# Altium PCB CH579M-R1.PcbDoc
Units mil, origin at the board's own origin, x right, y up, seen from the top; angles counter-clockwise.
Board outline 2218 x 2789.18 mil, 2 copper layers (Top Layer, Bottom Layer); 48 components, 67 nets, 240 pads, 289 vias.
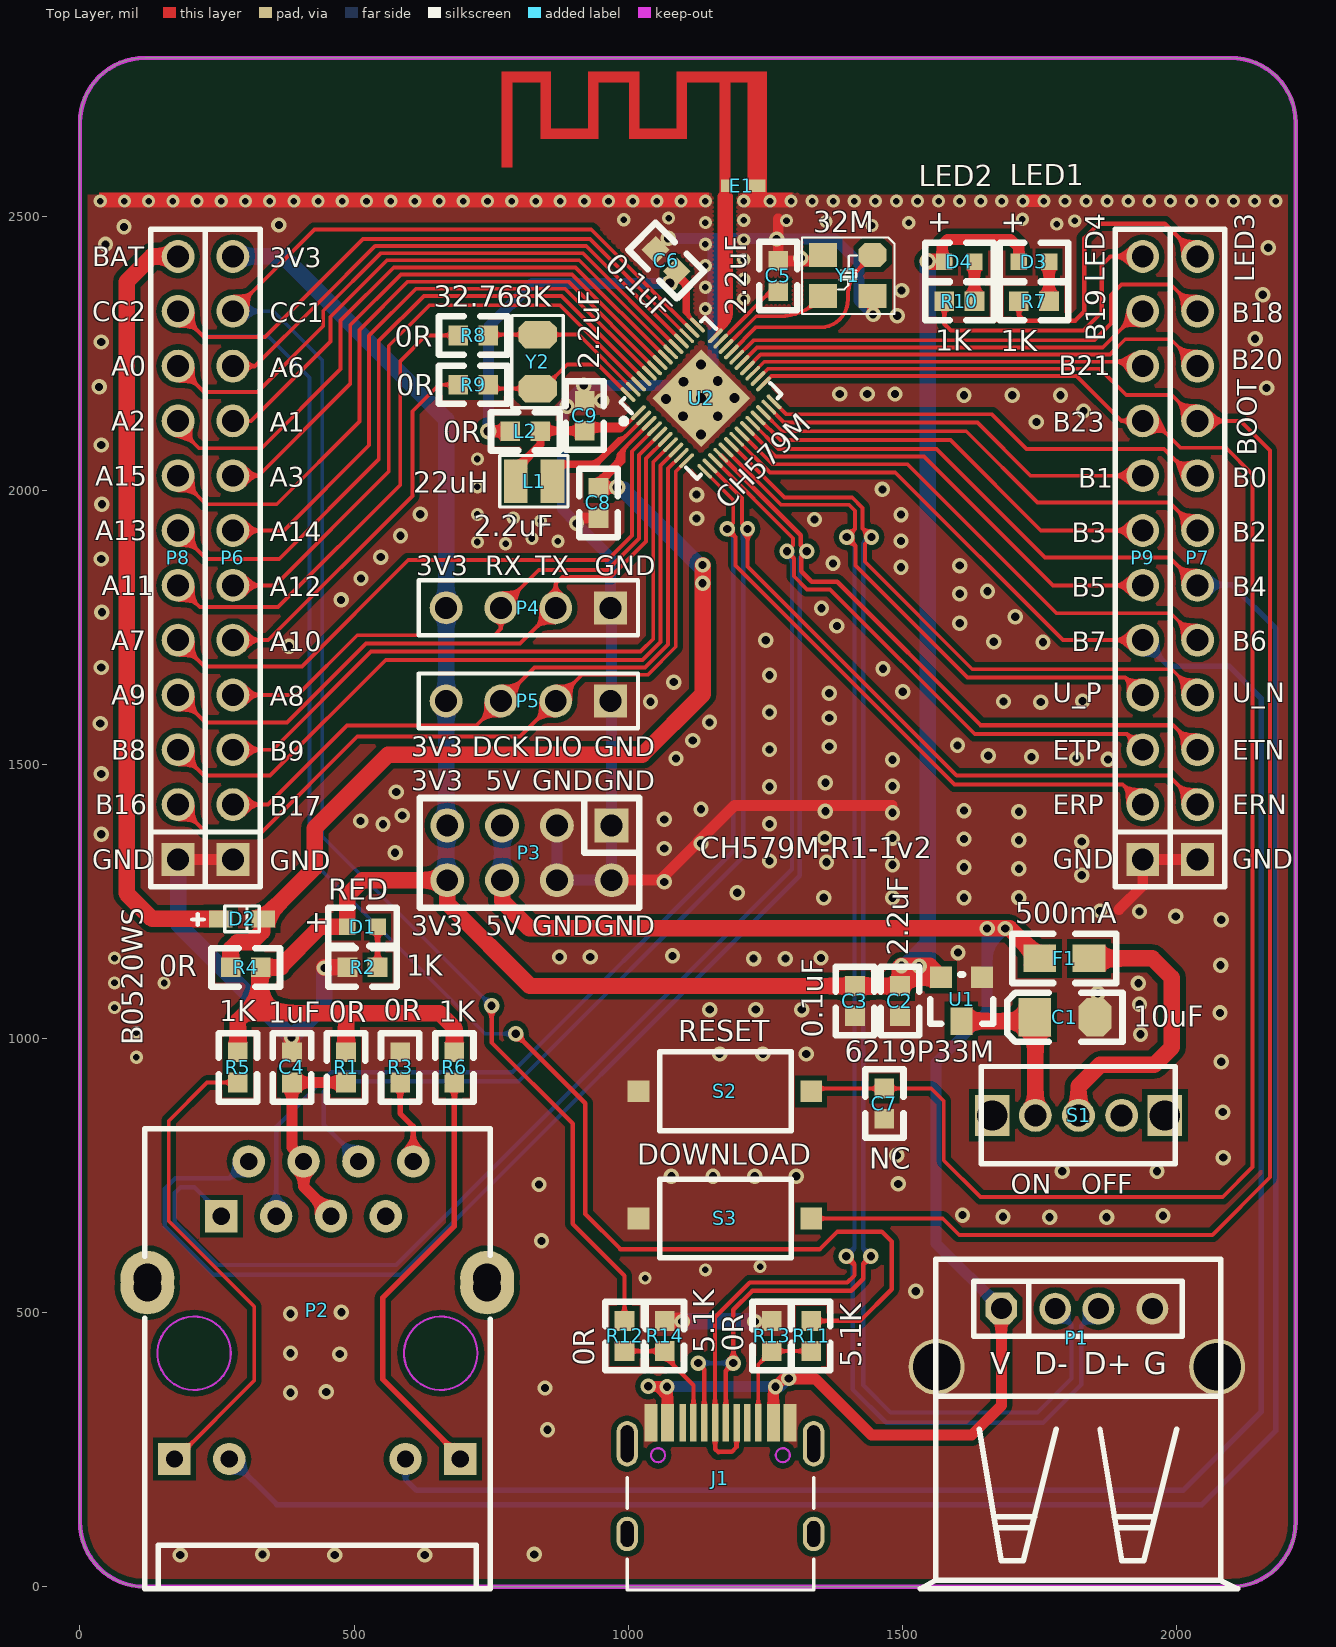
[diagram p0: Top Layer view]
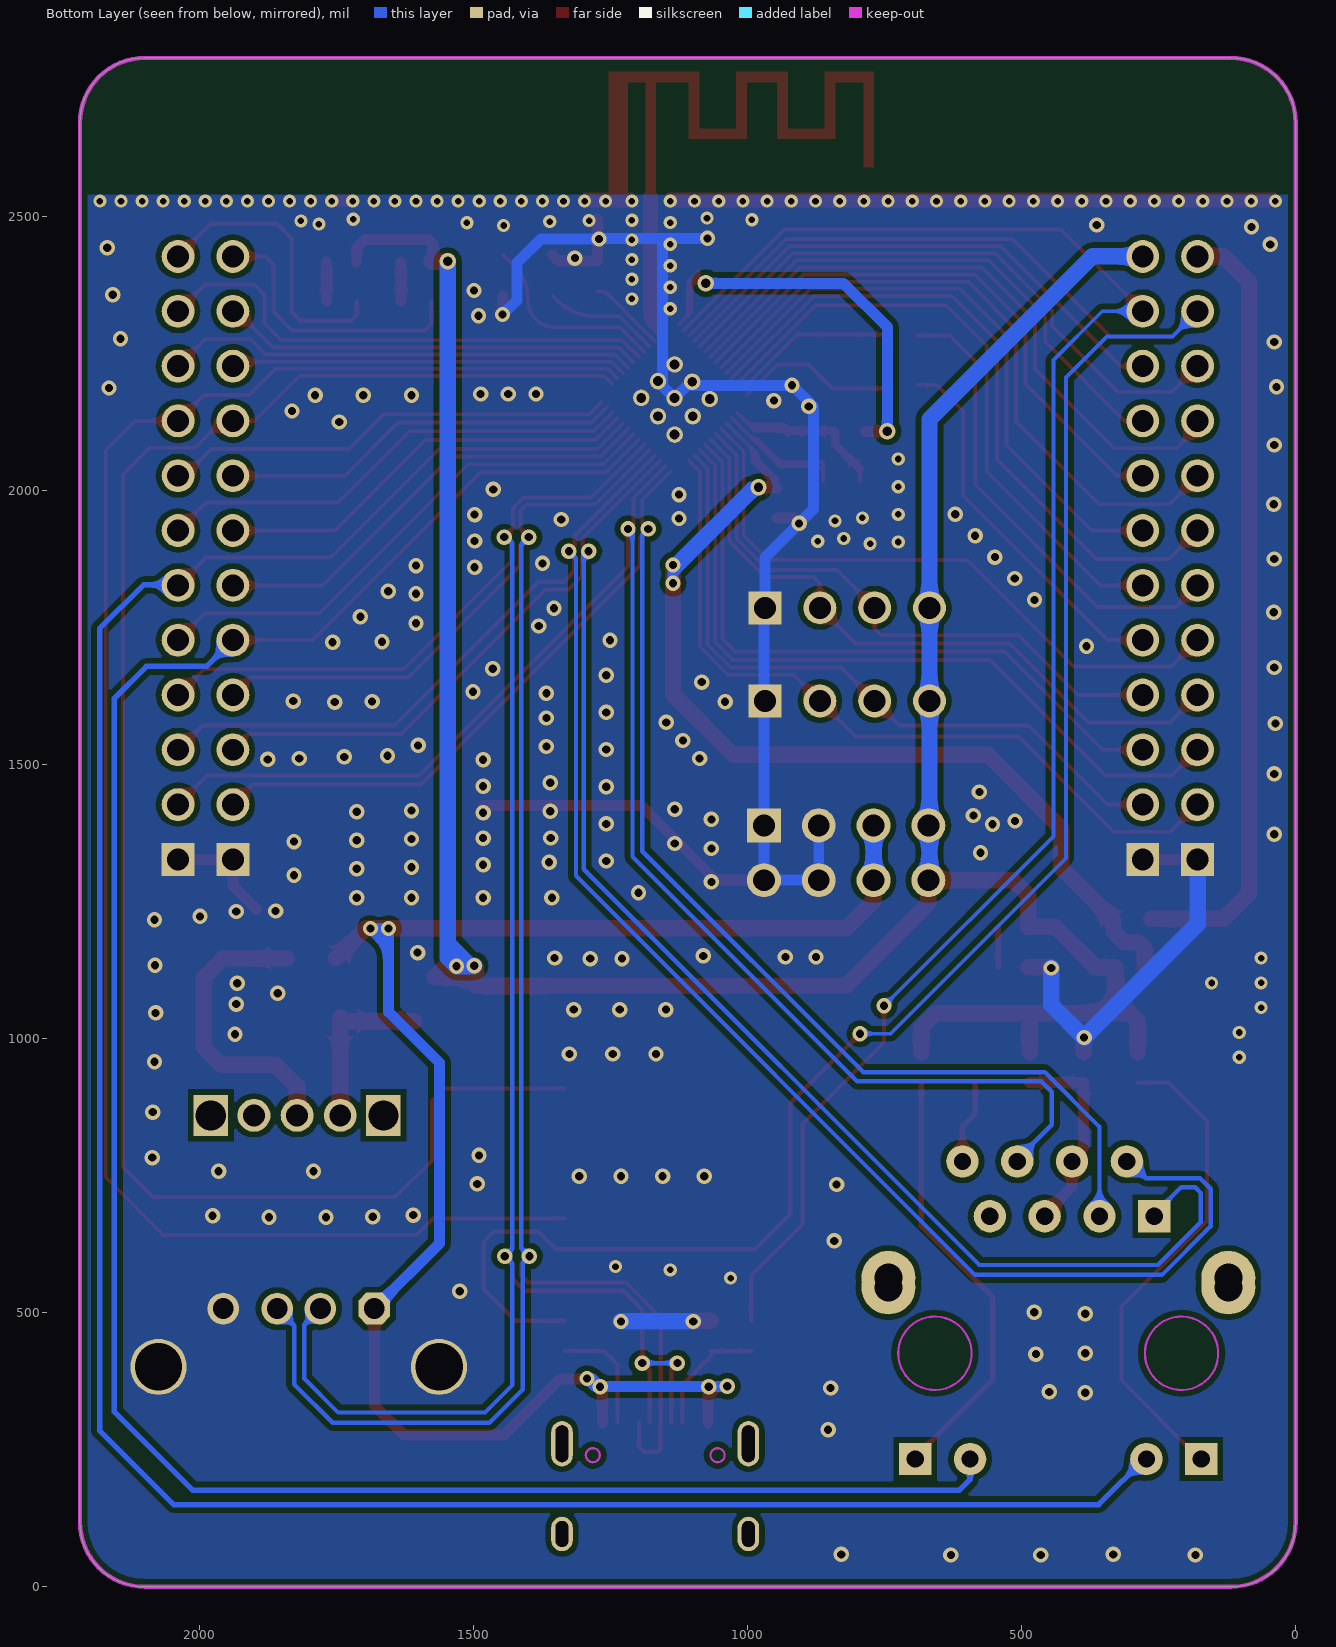
[diagram p1: Bottom Layer view, seen from below]

## Layer stack, top to bottom
Top Solder: solder mask 0.4, Solder Resist, Dk 3.5
Top Layer: signal copper 1.4
Dielectric1: dielectric 12.6, FR-4, Dk 4.8
Bottom Layer: signal copper 1.4
Bottom Solder: solder mask 0.4, Solder Resist, Dk 3.5

## Board outline
0,118.11 0,2671.07 cw(c118.11,2671.07) 118.11,2789.18 2099.89,2789.18 cw(c2099.89,2671.07) 2218,2671.07 2218,118.11 cw(c2099.89,118.11) 2099.89,0 118.11,0 cw(c118.11,118.11)

## Design rules (kind name [scope] priority, off if disabled: settings)
Clearance Clearance111 [InNamedPolygon('GNDAA')] p1: gap=6
Clearance ClearanceALL [InPolygon] p2: gap=10
Clearance [All] p3: gap=6
ComponentClearance [All] p1 off: gap=10 collisioncheckmode=3 verticalgap=10 showdistances=FALSE
DiffPairsRouting [All] p1: maxlimit=6 minlimit=6 mostfreqgap=6 toplayer_minwidth=15 toplayer_maxwidth=15 toplayer_prefwidth=15 bottomlayer_minwidth=15 bottomlayer_maxwidth=15 bottomlayer_prefwidth=15 maxuncoupledlength=500
MinimumSolderMaskSliver [All] p1 off: minsoldermaskwidth=10
PolygonConnect [All] p1: connectstyle=Direct reliefconductorwidth=10 reliefentries=4 polygonreliefangle="90 Angle" airgapwidth=10
RoomDefinition CH579M-R1 [InComponentClass('CH579M-R1')] p1: confinementstyle=ConfineIn formatcopy=TRUE lockcomponents=FALSE outline -11451,-3963 -9451,-3963 -9451,-2963 -11451,-2963
RoutingVias [All] p1: holewidth=15 width=28 viastyle="Through Hole" minholewidth=12 minwidth=24 maxholewidth=28 maxwidth=50
SilkToSilkClearance [All] p1 off: silktosilkclearance=10
SilkToSolderMaskClearance SilkscreenOverComponentPads [IsPad] p1 off: minsilkscreentomaskgap=10 clearancetoexposedcopper=TRUE
SolderMaskExpansion [All] p1: expansion=4
Width [All] p1: maxlimit=50 minlimit=6 preferedwidth=10
25 further rules are at their usual default settings.

## Classes and differential pairs
polygon class "New Class": GNDAA
polygon class "New Class 1": GNDALL
differential pair NewDifferentialPair1: +PB10 -PB11
differential pair ETH_TX: +ETH_TX_P -ETH_TX_N
differential pair ETH_RX: +ETH_RX_P -ETH_RX_N

## Components (designator, comment, footprint, x,y, rotation, side; value= is the part's Value field where it differs from the comment)
C1 "10uF" 3216 1742,1039 r180 top
C2 "2.2uF" 0603 1496,1096 r270 top
C3 "0.1uF" 0603 1414,1096 r270 top
C4 "1uF" 0603 386.75,975 r270 top
C5 "2.2uF" 0603 1274,2364 r90 top
C6 "0.1uF" 0603 1089,2400 r135 top
C7 "NC" 0603 1467.54,854 r90 top
C8 "2.2uF" 0603 946,1950 r90 top
C9 "2.2uF" 0603 921,2164 r270 top
D1 "RED" 0603+ 488,1204 r0 top
D2 "B0520WS" SOD323 257,1218.38 r270 top
D3 "LED1" 0603+ 1713,2417 r0 top
D4 "LED2" 0603+ 1577,2417 r0 top
E1 "ANTENNA" ANT-F-1-2.4G-1.6 1177,2556 r0 top
F1 "500mA" 0805 1751,1146.5 r0 top
J1 "TYPE-C-Receptacle-2.0" TYPE-C-Receptacle-2.0 1168.49,-6.01 r0 top
L1 "22uH" SMD-2.5*2*1.05 862,2017 r180 top
L2 "0R" 0603 840,2108 r180 top
P1 "USB" USBA-L 1681,507.42 r0 top
P2 "HR911105A" HR911105A 258,676 r0 top
P3 "Header 4X2A" IDC8 970.13,1389 r270 top
P4 "Header 4" HDR1X4 968.06,1786 r180 top
P5 "Header 4" HDR1X4 968.06,1616 r180 top
P6 "Header 12" "SIP12 - 40mil" 279,1327 r90 top
P7 "Header 12" "SIP12 - 40mil" 2039,1327 r90 top
P8 "Header 12" "SIP12 - 40mil" 179,1327 r90 top
P9 "Header 12" "SIP12 - 40mil" 1939,1327 r90 top
R1 "0R" 0603 485.5,920 r90 top
R2 "1K" 0603 543,1130 r180 top
R3 "0R" 0603 584.25,975 r270 top
R4 "0R" 0603 330,1130 r180 top
R5 "1K" 0603 288,975 r270 top
R6 "1K" 0603 683,975 r270 top
R7 "1K" 0603 1713,2345.33 r0 top
R8 "0R" 0603 690,2283 r0 top
R9 "0R" 0603 690,2193 r0 top
R10 "1K" 0603 1577,2345.33 r0 top
R11 "0R" 0603 1334,485 r270 top
R12 "0R" 0603 993.5,485 r270 top
R13 "5.1K" 0603 1262,430 r90 top
R14 "5.1K" 0603 1067,430 r90 top
S1 "SW SPDT" KEY_B 1664.32,860 r0 top
S2 "RST#" SMD_6.1x3.65x2.5mm-KEY 1018.99,903.91 r0 top
S3 "Download" SMD_6.1x3.65x2.5mm-KEY 1018.99,671.91 r0 top
U1 "6219P33M" SOT-23 1646,1112 r180 top
U2 "CH579M" QFN48_5X5 1019,2142 r315 top
Y1 "32M" 3225 1446,2355 r180 top
Y2 "32.768K" fc-135 835,2186 r90 top

## Footprints (in the part's own frame and the unit in brackets; to place one, negate y for a bottom-side part, rotate by r counter-clockwise, add the part's x,y. Pads: shape width x height; smd on the part's side, far side on the other; paste and mask are expansions set on the pad)
0603 [mil]
  rect 36x36 smd: 1(0,0) 2(55,0)
  silkscreen extent -35,-35 90,35
0603+ [mil]
  rect 30x30 smd: 1(0,0) 2(55,0)
  silkscreen extent -35,-35 90,35
0805 [mil]
  rect 60x50 smd: 1(0,0) 2(90,0)
  silkscreen extent -50,-45 140,45
3216 [mil]
  rect 60x70 smd: 1(0,0)
  oct 60x70 smd: 2(-110,0)
  silkscreen extent -160,-45 50,45
3225 [mm]
  oct 1.3x1.1 smd: 1(0,-1.9)
  rect 1.3x1.1 smd: 2(2.3,-1.9) 3(2.3,0) 4(0,0)
  silkscreen extent -1.02,-2.7 3.27,0.84
ANT-F-1-2.4G-1.6 [mm]
  rect 0.8x0.6 smd mask+0: 0(1.483,0)
  rect 0.4x0.6 smd mask+0: 1(0,0)
  Top Layer region: 0.24,5.027 -0.26,5.027 -0.26,-0.304 0.24,-0.304
  Top Layer region: 1.94,5.002 1.04,5.002 1.04,-0.304 1.94,-0.304
  Top Layer region: 1.94,5.296 -2.26,5.296 -2.26,4.796 1.94,4.796
  Top Layer region: -1.759,4.977 -2.259,4.977 -2.259,2.157 -1.759,2.157
  Top Layer region: -1.85,2.651 -4.39,2.651 -4.39,2.156 -1.85,2.156
  Top Layer region: -3.96,4.976 -4.46,4.976 -4.46,2.156 -3.96,2.156
  Top Layer region: -3.96,5.296 -6.36,5.296 -6.36,4.796 -3.96,4.796
  Top Layer region: -5.861,4.977 -6.361,4.977 -6.361,2.157 -5.861,2.157
  Top Layer region: -5.874,2.657 -8.364,2.657 -8.364,2.157 -5.874,2.157
  Top Layer region: -8.061,4.977 -8.561,4.977 -8.561,2.157 -8.061,2.157
  Top Layer region: -8.06,5.296 -10.36,5.296 -10.36,4.796 -8.06,4.796
  Top Layer region: -9.86,4.976 -10.36,4.976 -10.36,0.856 -9.86,0.856
fc-135 [mil]
  oct 50x70 smd: 1(0,0) 2(98.43,0)
  silkscreen extent -35,-47 133,47
HDR1X4 [mil] "Connector; Header; 4 Position"
  rect 60x60 hole 40: 1(0,0)
  round 60 hole 40: 2(100,0) 3(200,0) 4(300,0)
  silkscreen extent -50,-50 350,50
HR911105A [mm]
  rect 1.5x1.5 hole 0.8: 1(0,0) 9(-2.175,-11.252) 12(11.075,-11.252)
  round 1.5 hole 0.8: 2(1.27,2.54) 3(2.54,0) 4(3.81,2.54) 5(5.08,0) 6(6.35,2.54) 7(7.62,0) 8(8.89,2.54) 10(0.365,-11.252) 11(8.535,-11.252)
  round 2.5 hole 1.3: ""(-3.43,-2.852) ""(-3.43,-3.3) ""(12.32,-3.3) ""(12.32,-2.852)
  Keep-Out Layer circle w0.1: c-1.265,-6.352 r1.7
  Keep-Out Layer circle w0.1: c10.165,-6.352 r1.7
  silkscreen extent -3.55,-17.27 12.45,4.06
IDC8 [mil]
  rect 62x62 hole 40: 1(0,0)
  round 62 hole 40: 2(100,0) 3(0,-100) 4(100,-100) 5(0,-200) 6(100,-200) 7(0,-300) 8(100,-300)
  silkscreen extent -50,-350 150,50
KEY_B [mm]
  rect 1.6x1.9 hole 1.4: 0(0,0) 0(8,0)
  round 1.524 hole 1.016: 1(4,0) 2(2,0) 3(6,0)
  silkscreen extent -0.52,-2.24 8.48,2.26
QFN48_5X5 [mm]
  rect 3.2x3.2 smd: 0(1.575,2.525)
  oval 0.18x0.9 smd: 1(0,0) 2(0.35,0) 3(0.7,0) 4(1.05,0) 5(1.4,0) 6(1.75,0) 7(2.1,0) 8(2.45,0) 9(2.8,0) 10(3.15,0) 25(3.15,5.037) 26(2.8,5.037) 27(2.45,5.037) 28(2.1,5.037) 29(1.75,5.037) 30(1.4,5.037) 31(1.05,5.037) 32(0.7,5.037) 33(0.35,5.037) 34(0,5.037)
  oval 0.9x0.18 smd: 11(4.089,0.25) 12(4.089,0.6) 13(4.089,0.95) 14(4.089,1.3) 15(4.089,1.65) 16(4.089,2) 17(4.089,2.35) 18(4.089,2.7) 19(4.089,3.05) 20(4.089,3.4) 21(4.089,3.75) 22(4.089,4.1) 23(4.089,4.45) 24(4.089,4.8) 35(-0.939,4.8) 36(-0.939,4.45) 37(-0.939,4.1) 38(-0.939,3.75) 39(-0.939,3.4) 40(-0.939,3.05) 41(-0.939,2.7) 42(-0.939,2.35) 43(-0.939,2) 44(-0.939,1.65) 45(-0.939,1.3) 46(-0.939,0.95) 47(-0.939,0.6) 48(-0.939,0.25)
  silkscreen extent -0.93,-0.89 4.08,5.29
"SIP12 - 40mil" [mil]
  rect 60x60 hole 40: 1(0,0)
  round 60 hole 40: 2(100,0) 3(200,0) 4(300,0) 5(400,0) 6(500,0) 7(600,0) 8(700,0) 9(800,0) 10(900,0) 11(1000,0) 12(1100,0)
  silkscreen extent -50,-50 1150,50
SMD-2.5*2*1.05 [mm]
  rect 1.1x2 smd: 1(0,0) 2(1.7,0)
  silkscreen extent -0.72,-1.19 2.44,1.2
SMD_6.1x3.65x2.5mm-KEY [mm]
  rect 1x1 smd: 1(0,0) 2(8,0)
  silkscreen extent 0.98,-1.83 7.08,1.83
SOD323 [mm]
  rect 0.8x1.1 smd: 1(0,0) 2(0,1.972)
  silkscreen extent -0.6,-1.32 0.6,1.79
SOT-23 [mil]
  rect 40x40 smd: 1(0,0) 2(75,0)
  rect 40x50 smd: 3(38,80)
  silkscreen extent -20,-5 95,85
TYPE-C-Receptacle-2.0 [mm]
  oval 1x1.6 hole 0.6 slot 1.2 at 90 deg: 0(-4.32,2.6) 0(4.32,2.6)
  oval 1x2.1 hole 0.6 slot 1.7 at 90 deg: 0(-4.32,6.78) 0(4.32,6.78)
  rect 0.6x1.75 smd: A1(-3.225,7.75) A4(-2.45,7.75) B1(3.225,7.75) B4(2.45,7.75)
  rect 0.3x1.75 smd: A5(-1.25,7.75) A6(-0.25,7.75) A7(0.25,7.75) A8(1.25,7.75) B5(1.75,7.75) B6(0.75,7.75) B7(-0.75,7.75) B8(-1.75,7.75)
  Keep-Out Layer circle w0.1: c2.89,6.25 r0.325
  Keep-Out Layer circle w0.1: c-2.89,6.25 r0.325
  silkscreen extent -4.32,0 4.32,5.2
USBA-L [mm]
  oct 1.473x1.473 hole 0.965: 1(0,0)
  round 1.473 hole 0.965: 2(2.5,0) 3(4.5,0) 4(7,0)
  round 2.6 hole 2.2: 5(-3,-2.7) 6(10,-2.7)
  silkscreen extent -3.75,-12.99 10.95,2.29

## Part data
C1 C2 C3 C4 C5 C6 C7 C8 C9: library part CAP, "Capacitor"
D1: library part LED0, "Typical INFRARED GaAs LED"
D2: library part DIODE, "Diode"
D3 D4: library part LED
E1: "Generic Antenna"
F1: library part FUSE1, "Fuse"
J1: "Type-C USB2.0 母座"
L1 L2: library part INDUCTOR
P1: "USB Port"
P3: "Header, 4-Pin, Dual row"
P4 P5: "Header, 4-Pin"
P6 P7 P8 P9: "Header, 12-Pin"
R1 R2 R3 R4 R5 R6 R7 R8 R9 R10 R11 R12 R13 R14: library part RES
S2 S3: library part KEY1
U2: "ARM M0 MCU with BLE+Zigbee+Ethernet+USB"
Y1 Y2: library part XTAL, "Crystal Oscillator"

## Free pads (board coordinates)
  round 30 hole 18: 0(1133,2230) 1(1163.5,2199.5) 2(1194,2169) 3(1163.5,2135.5) 4(1133,2102) 5(1100,2135.5) 6(1069,2167) 7(1101,2198.5) 9(1133.14,2168.45)

## Via types
v1: diameter 28, hole 15, Top Layer to Bottom Layer, tented both sides, 196 vias
v2: diameter 24, hole 12, Top Layer to Bottom Layer, tented both sides, 89 vias
v3: diameter 30, hole 17, Top Layer to Bottom Layer, tented both sides, 4 vias

## Nets (pads, with @x,y where several pads share a name; then routed paths per layer and width w, separated by ;. In a path a pad name is that pad's centre, name@x,y a point inside that pad or via, vN(x,y) a via of type N, cw(c..) or ccw(c..) an arc to the next point about the centre after c; other vN are vias at no path point)
3V3: C2.1 C3.1 D1.1 D3.1 D4.1 P3.7 P3.8 P4.4 P5.4 P6.12 R1.2 R4.1 R5.1 R6.1 U1.2 | length 5300.1
  Top Layer w20: D4.1 1573,2421 1573,2448 1583,2458 1698,2458 1713,2443 D3.1
  Top Layer w30: R5.1 288,1032.5 302,1046.5 ; 367,1130 364.5,1130 ; R1.2 485.5,1041 491,1046.5 ; R6.1 683,1020 656.5,1046.5 491,1046.5 ; v3(1547,2418) 1548,2417 D4.1 ; 302,1046.5 328,1072.5 ; 302,1046.5 324,1046.5 ; 324,1046.5 328,1050.5 328,1072.5 ; 324,1046.5 354,1046.5 ; 328,1072.5 328,1130 R4.1 364.5,1130 ; 328,1072.5 354,1046.5 ; 354,1046.5 491,1046.5 ; 364.5,1130 438.5,1204 D1.1 488,1261.5 515.5,1289 P3.8 670.13,1246.87 821,1096 C3.1 C2.1 ; C2.1 1496,1130.25 v1(1498.75,1133) 1550,1133 U1.2 1512,1112 C2.1
  Bottom Layer w30: P6.12 371,2427 668.06,2129.94 P4.4 P5.4 668.06,1291.06 P3.8 ; v1(1498.75,1133) 1499.75,1132 v1@1505,1132 ; v3(1547,2418) 1547,1174 ; v1@1505,1132 1547,1174 ; v1@1505,1132 v1(1531,1132) 1547,1148 1547,1174
+5V: F1.1 J1.A4 J1.B4 P1.1 P3.5 P3.6 | length 3168
  Top Layer w20: v1(1037,366) 1038,365 1054.5,365 ; J1.A4 1072.04,347.46 ; J1.B4 1264.95,360.95 v1(1269,365) 1283,379 1342,379 1444,277 1627,277 1681,331 P1.1 ; 1054.5,365 1072.04,347.46 ; 1054.5,365 v1(1071,365) 1072.04,363.96 1072.04,347.46
  Top Layer w30: P3.6 770.13,1250.87 820,1201 v1(1655,1201) v1(1688,1201) 1696.5,1201 F1.1
  Bottom Layer w20: v1(1037,366) 1038,365 v1(1071,365) v1(1269,365) ; P1.1 1562,626.42 1562,956 1655,1049 1655,1168 ; v1(1269,365) 1278.06,365 v1(1293,379.94) 1283.94,379.94 v1(1269,365) ; 1655,1168 v1(1688,1201) v1(1655,1201) 1655,1168
  Bottom Layer w30: P3.6 P3.5
+BAT: D2.1 P8.12 | length 1427.4
  Top Layer w30: P8.12 131,2427 85,2381 85,1265 131.62,1218.38 D2.1 D2.1@264,1218.38
ANT: E1.1 U2.34 | length 418
  Top Layer w7: 1166.49,2330.16 1166.49,2299.75 cw(c1141.72,2299.75) U2.34 ; 1168.97,2327.01 1168.97,2305.73 cw(c1135.74,2305.73) U2.34 ; 1174.22,2297.22 U2.34@1160.74,2283.74 ; 1177,2323 cw(c1121.47,2323) U2.34@1160.74,2283.74 ; 1180.22,2311.71 cw(c1159.73,2311.71) 1174.23,2297.23 1178.44,2301.44 ccw(c1157.04,2322.85) 1187.31,2322.85 ; U2.34 U2.34@1160.74,2283.74
  Top Layer w28.1: 1177,2323 1177,2523 ; 1177,2525.41 1177,2535.5
BOOT: P7.9 S3.2 U2.26 | length 3221.9
  Top Layer w7: U2.26 1254.9,2222 1861,2222 1909,2174 1992,2174 P7.9 2117,2127 2171,2073 2171,747 2065.91,641.91 1604.09,641.91 1574.09,671.91 S3.2
CC1: J1.A5 R12.2 R14.1 | length 226
  Top Layer w7: R14.1@1067,420 R14.1
  Top Layer w8: R12.2 R14.1 ; R14.1@1067,420 1119.28,367.72 J1.A5
CC2: J1.B5 R11.2 R13.1 | length 213.1
  Top Layer w7: J1.B5 1237.39,405.39 R13.1 R11.2
ETH_RX_N: P2.6 P7.2 U2.12 | length 2905.8
  Top Layer w7: U2.12 1208,1986.41 1208,1940 v1(1218,1930) 1218,1861.5 1599.5,1480 1986,1480 P7.2
  Bottom Layer w8: P2.6@508,780 445,843 445,903 464,922 800,922 1210,1332 1210,1922 v1(1218,1930)
ETH_RX_P: P2.3 P9.2 U2.11 | length 2922
  Top Layer w7: U2.11 1192,1982.92 1192,1941 v1(1181,1930) 1196,1915 1196,1863 1595.5,1463.5 1902.5,1463.5 P9.2
  Bottom Layer w8: P2.3@358,680 358,839 458,939 789,939 1192,1342 1192,1919 v1(1181,1930)
ETH_TX_N: P2.2 P7.3 U2.14 | length 3476
  Top Layer w8: U2.14 1315,1918.38 1315,1900 v1(1326,1889) 1316,1879 1316,1852.5 1335,1833.5 1381.5,1833.5 1643,1572 1994,1572 P7.3
  Bottom Layer w8: P2.2@308,780 273,745 174,745 155,726 155,658 244,569 585,569 1313,1297 1313,1876 v1(1326,1889)
ETH_TX_P: P2.1 P9.3 U2.13 | length 3251.2
  Top Layer w7: U2.13 1301,1912.89 1301,1900 v1(1290,1889) 1302.5,1876.5 1302.5,1843.5 1326.5,1819.5 1368.5,1819.5 1632.5,1555.5 1910.5,1555.5 P9.3
  Bottom Layer w8: P2.1@258,680 209,729 183.46,729 173,718.54 173,665.46 251.46,587 577,587 1299,1309 1299,1880 v1(1290,1889)
GND: C1.2 C2.2 C3.2 C4.1 C5.2 C6.2 C7.1 C8.1 C9.1 J1.A1 J1.B1 P1.4 P1.5 P1.6 P3.1 P3.2 P3.3 P3.4 P4.1 P5.1 P6.1 P7.1 P8.1 P9.1 pad.0 pad.1 pad.2 pad.3 pad.4 pad.5 pad.6 pad.7 pad.9 R2.2 R3.1 R13.2 R14.2 S2.1 S3.1 U1.1 U2.0 | length 4102.1
  Top Layer w20: P8.1 P6.1 ; v1(906,1940) 916,1950 C8.1 ; P3.2 1058,1289 1194,1425 v1@1482,1425 ; 1235.38,2533.62 1235.38,2556 ; v1(1271,2459) cw(c1263.76,2451.76) v1@1274,2451.76 ; 1274,2495 1274,2492.5 v1@1274,2451.76 ; 1355.45,2429.8 1344.65,2419 C5.2 v1@1274,2451.76 ; 1446,2355 1446,2323.41 ccw(c1449.41,2323.41) v1(1447,2321) ; 1896,1236 1939,1279 P9.1 P7.1
  Top Layer w30: v1(386,1002) 386.75,1001.25 C4.1 ; v1(446,1129) 447,1130 R2.2 ; R14.2 1098,485 v1(1099,484)
  Bottom Layer w20: P3.3 P3.4 P3.2 P3.1 970.13,1783.94 P4.1 968.06,1877.94 v1(906,1940) 880,1966 880,2153 v1(919,2192) 1109.59,2192 pad.9 1155,2190.31 1155,2447 v2@1142,2460 ; v1(1073,2460) v2@1142,2460 ; v1(1447,2321) 1421,2347 1421,2415 1377,2459 v1(1271,2459) ccw(c1268.59,2456.59) 1268.59,2460 v2@1142,2460
  Bottom Layer w30: P8.1 179,1209 v1(386,1002) 446,1062 v1(446,1129) ; v1(1099,484) v1(1231,484)
  other v1: 183,58 465,58 629,58 333,59 829,59 853,286.5 384,354 449.5,355.5 848.5,362.5 474,424.5 384,426 384,498 477,501 1525,539 842,631 1769,674 1873,674 1684,675 1976,677 1610,678 837.5,734 1493,735 1079,749 1155,749 1231,749 1307,749 1792,758 1965,758 2086,783 1490,787 2085,866 2082,958 1167,972 1246,972 1325,972 1935,1008 2080,1047 1149,1053 1233,1053 1317,1053 1933,1063 1857,1083 1931,1101 2081,1134 1229,1146 1287,1146 1352,1147 875,1149 931,1149 1081,1151 1602,1157 2082,1217 1999,1223 1933,1232 1861,1233 1357,1257 1482.5,1257 1613,1257 1713,1257 1199,1266 1066,1286 1827.5,1298 1713,1310 1613,1312.67 1482.5,1317.4 1362,1322 1258,1324 575,1339 1066,1347 1133,1356 1827.5,1359.5 1713,1362 1613,1364.33 1359,1366 1482.5,1365.8 39,1373 553,1391 1258,1391.8 512,1397 1066,1400 588,1407 1482.5,1412.2 1713,1414 1360,1415 1613,1416 1133,1418.5 577,1450 1258,1459.6 1482.5,1460.6 1360,1467 39,1483 1482.5,1509 1875.5,1509.5 1087.5,1511 1818,1511 1736,1514 1657,1516 1258,1527.4 1367,1533 1601,1535 1118,1544 37,1575 1148.5,1577 1367,1585 1258,1595.2 1753,1614 1041,1614.5 1685,1615 1829,1615.75 1367,1630 1501,1632.75 1083.5,1650.5 1258,1663 1465,1675 39,1677 381.5,1716 1757,1723 1667,1724 1251,1727 1381,1752.75 1605,1758 1706.33,1769.67 40,1778 1353,1785 476.5,1800.5 1605,1811.5 1655.67,1816.33 512.62,1839.5 1498,1860 1605,1863 1374,1867 39,1875 548.75,1878.5 1498,1908 584.88,1917.5 1340,1947 1125,1949 1498,1956 621,1956.5 40,1975 1125,1992.5 1464,2002 39,2083 1745,2125 1831,2145 888.5,2153.5 952,2164 1613,2174 1701,2174 1789,2174 1386,2176 1436.5,2176 1487,2176 2165,2187 35,2189 39,2271 2144,2277 1491,2319 2158,2357 1499,2365 1315,2424 2168,2443 46.5,2449 80.5,2481 363,2484.5
  other v2: 1031,563 1141,578 1241,584 103,966 103,1011.25 63,1056.5 153.5,1101.5 63,1101.75 63,1147 776.5,1903 725,1906 872,1907.5 824.5,1912.5 840.5,1944.5 790.5,1950 725,1956.5 725,2007 725,2057.5 1141,2331.5 1211.05,2349.5 1141,2370.8 1211.05,2385.38 1141,2410.1 1211.05,2421.25 1141,2449.4 1211.05,2457.12 1445,2483.5 1782,2486 1141,2488.7 1512,2488.5 1361,2490.5 1815,2492 1211.05,2493 1289,2492.5 992,2494 1719.5,2495 1074,2497 37,2528 81.16,2528 125.32,2528 169.48,2528 213.64,2528 257.8,2528 301.96,2528 346.12,2528 390.28,2528 434.44,2528 478.6,2528 522.76,2528 566.92,2528 611.08,2528 655.24,2528 699.4,2528 743.56,2528 787.72,2528 831.88,2528 876.04,2528 920.2,2528 964.36,2528 1008.52,2528 1052.68,2528 1096.84,2528 1141,2528 1211.05,2528 1258.94,2528 1297.38,2528 1335.82,2528 1374.26,2528 1412.7,2528 1451.14,2528 1489.58,2528 1528.02,2528 1566.46,2528 1604.9,2528 1643.34,2528 1681.78,2528 1720.22,2528 1758.66,2528 1797.1,2528 1835.54,2528 1873.98,2528 1912.42,2528 1950.86,2528 1989.3,2528 2027.74,2528 2066.18,2528 2104.62,2528 2143.06,2528 2181.5,2528
NetC4_2: C4.2 P2.4 P2.5 R1.1 | length 368.3
  Top Layer w20: P2.5@458,680 408,730 P2.4 408,780 386.75,801.25 C4.2 R1.1
NetD1_2: D1.2 R2.1 | length 74
  Top Layer w10: R2.1 D1.2
NetD3_2: D3.2 R7.2 | length 71.7
  Top Layer w20: R7.2 D3.2
NetD4_2: D4.2 R10.2 | length 71.7
  Top Layer w20: R10.2 D4.2
NetF1_2: F1.2 S1.1 | length 545.2
  Top Layer w30: S1.1 1821.8,912.8 1861,952 1960,952 1992,984 1992,1111 1956.5,1146.5 F1.2
NetP2_8: P2.8 R3.2 | length 149.8
  Top Layer w10: R3.2 584.25,863.75 608,840 P2.8@608,780
NetP2_9: P2.9 R5.2 | length 896.8
  Top Layer w7: P2.9@172.37,237.01 179.01,237.01 318,376 318,511 162,667 162,850 232,920 R5.2
NetP2_12: P2.12 R6.2 | length 795.7
  Top Layer w10: R6.2 683,658 552.5,527.5 552.5,378.53 P2.12@694.02,237.01
NetP7_12: P7.12 R7.1 | length 532.1
  Top Layer w8: R7.1 1713,2320 1723,2310 1816,2310 1832,2326 1832,2460 1859,2487 1979,2487 P7.12
NetP9_12: P9.12 R10.1 | length 514.6
  Top Layer w8: R10.1 1577,2304 1589,2292 1831,2292 1864.5,2325.5 1864.5,2411.5 1880,2427 P9.12
PA0: P8.10 U2.39 | length 1119.7
  Top Layer w7: P8.10 226,2180 324,2180 444,2300 444,2328 549,2433 917.3,2433 U2.39
PA1: P6.9 U2.40 | length 1015.6
  Top Layer w7: P6.9 312,2127 457,2272 457,2317 560,2420 910.82,2420 U2.40
PA2: P8.9 U2.41 | length 1173.1
  Top Layer w7: P8.9 179,2115 217,2077 331,2077 475.5,2221.5 475.5,2310 572.5,2407 904.33,2407 U2.41
PA3: P6.8 U2.42 | length 1060.7
  Top Layer w7: P6.8 326,2027 493,2194 493,2301.5 585.5,2394 897.84,2394 U2.42
PA4: P6.11 R12.1 U2.36 | length 3157
  Top Layer w7: P6.11 428,2476 932.77,2476 U2.36
  Top Layer w8: v1(751,1060) 751,993 899,845 899,662 993.5,567.5 R12.1
  Bottom Layer w7: P6.11 353,2327 442,2238 442,1369 v1(751,1060)
PA5: P8.11 R11.1 U2.37 | length 4016.3
  Top Layer w7: P8.11 226,2280 337.5,2280 516.5,2459 930.28,2459 U2.37
  Top Layer w8: v1(795,1009) 922,882 922,680 986,616 1350,616 1382,648 1463,648 1481,630 1481,543 1423,485 R11.1
  Bottom Layer w7: P8.11 225,2281 344,2281 419,2206 419,1329 739,1009 v1(795,1009)
PA6: P6.10 U2.38 | length 980.8
  Top Layer w7: P6.10 319.69,2227 431,2338.31 431,2338.38 538.62,2446 923.79,2446 U2.38
PA7: P8.5 U2.4 | length 1158.9
  Top Layer w7: P8.5 227,1679 405,1679 599,1873 962.23,1873 1007,1917.77 1007,2071.54 U2.4
PA8: P4.3 P6.4 U2.5 | length 1087.8
  Top Layer w7: P6.4 397,1627 506,1736 756,1736 768.06,1748.06 P4.3 837.06,1855 962.62,1855 1020,1912.38 1020,2064.99 U2.5 U2.5
PA9: P4.2 P8.4 U2.6 | length 1237.9
  Top Layer w7: P8.4 229,1577 378,1577 522,1721 803.06,1721 P4.2 868.06,1830.06 880,1842 968,1842 1033,1907 1033,2058.56 U2.6
PA10: P6.5 R9.1 | length 694.5
  Top Layer w7: P6.5 343.5,1727 606.5,1990 606.5,2144.5 655,2193 R9.1
PA11: P8.6 R8.1 | length 865
  Top Layer w7: P8.6 218.5,1787.5 361.5,1787.5 584.5,2010.5 584.5,2236.5 631,2283 R8.1
PA12: P6.6 U2.46 | length 1145.8
  Top Layer w7: P6.6 356,1827 563.5,2034.5 563.5,2264 637.5,2338 875.89,2338 U2.46
PA13: P8.7 U2.45 | length 1259.3
  Top Layer w7: P8.7 231,1875 363.5,1875 545,2056.5 545,2272.5 627.5,2355 878.38,2355 U2.45
PA14: P6.7 U2.44 | length 1123.4
  Top Layer w7: P6.7 372,1927 527.5,2082.5 527.5,2282.5 613,2368 884.87,2368 U2.44
PA15: P8.8 U2.43 | length 1222.7
  Top Layer w7: P8.8 179,2026 230,1975 359,1975 510,2126 510,2293 598,2381 891.36,2381 U2.43
PB0: P7.8 U2.24 | length 828.4
  Top Layer w7: U2.24 1289.25,2139 1664,2139 1727,2076 1978,2076 2027,2027 P7.8
PB1: P9.8 U2.23 | length 734.1
  Top Layer w7: U2.23 1284.77,2124 1637.5,2124 1734.5,2027 P9.8
PB2: P7.7 U2.22 | length 881.2
  Top Layer w7: U2.22 1281.28,2108 1617,2108 1747,1978 1988,1978 P7.7
PB3: P9.7 U2.21 | length 786.9
  Top Layer w7: U2.21 1277.79,2092 1588,2092 1753,1927 P9.7
PB4: P2.10 P7.6 U2.20 | length 4575.2
  Top Layer w7: U2.20 1274.3,2076 1562.5,2076 1760.5,1878 1988,1878 P7.6
  Bottom Layer w10: P2.10@272.37,237.01 359.38,150 2047,150 2182,285 2182,1748 2102,1828 2040,1828 P7.6
PB5: P9.6 U2.19 | length 839.8
  Top Layer w7: U2.19 1268.82,2062 1540,2062 1775,1827 P9.6
PB6: P7.5 U2.18 | length 986.9
  Top Layer w7: U2.18 1263.33,2048 1509.5,2048 1781.5,1776 1990,1776 P7.5
PB7: P2.11 P9.5 U2.17 | length 4124
  Top Layer w7: U2.17 1258.84,2033 1487.5,2033 1793.5,1727 P9.5
  Bottom Layer w10: P2.11@594.02,237.01 P2.11 594.02,195.98 614,176 2012,176 2155,319 2155,1621 2097,1679 1987,1679 P9.5
PB8: P8.3 U2.8 | length 1362.2
  Top Layer w7: P8.3 226,1480 347,1480 558,1691 1026.38,1691 1059,1723.62 1059,2045.59 U2.8
PB9: P6.3 U2.7 | length 1218.2
  Top Layer w7: P6.3 352,1527 531,1706 1023,1706 1046,1729 1046,2052.08 U2.7
PB10: J1.A7 J1.B7 P1.2 P7.4 U2.16 | length 3931.9
  Top Layer w7: U2.16 1285.36,1987 1409,1987 1428,1968 1428,1931 v1(1444,1915) 1432,1903 1432,1870 1628,1674 1992,1674 P7.4
  Top Layer w8: v1(1128,408) 1138.96,397.04 J1.B7 ; J1.A7 1178.33,394.33 v1(1192,408) 1192,505.2 1226.8,540 1407,540 1429,562 1429,589 v1(1443,603)
  Bottom Layer w8: v1(1128,408) v1(1192,408) ; v1@1441,1916 1429,1904 1429,617 v1(1443,603) 1429,589 1429,368 1479,318 1747,318 1809,380 1809,477.84 P1.2
PB11: J1.A6 J1.B6 P1.3 P9.4 U2.15 | length 3868.2
  Top Layer w7: U2.15 1278.87,1974 1403,1974 1414,1963 1414,1930 v1(1399,1915) 1415,1899 1415,1863 1619,1659 1907,1659 P9.4
  Top Layer w8: J1.B6 1198.02,255.02 1189,246 1166,246 1165,245 1159,251 1159,298.76 J1.A6 1158.65,491.65 1222,555 1400,555 1413,568 1413,588 v1(1398,603)
  Bottom Layer w8: v1(1399,1915) 1413,1901 1413,618 v1(1398,603) 1410,591 1410,360 1471,299 1757,299 1827,369 1827,476.25 P1.3
PB16: P5.2 P8.2 U2.10 | length 1416.3
  Top Layer w7: P8.2 229,1377 332,1377 506,1551 803.06,1551 P5.2 916.06,1664 1036.15,1664 1087,1714.85 1087,2034.62 U2.10
PB17: P5.3 P6.2 U2.9 | length 1269.8
  Top Layer w7: P6.2 343,1427 487,1571 723.06,1571 P5.3 829.06,1677 1030.77,1677 1073,1719.23 1073,2040.1 U2.9
PB18: P7.11 U2.30 | length 946.5
  Top Layer w7: U2.30 1228.95,2274 1850,2274 1881,2305 1881,2357 1900,2376 1990,2376 P7.11
PB19: P9.11 U2.29 | length 769.8
  Top Layer w7: U2.29 1235.44,2261 1866,2261 1932,2327 P9.11
PB20: P7.10 U2.28 | length 863.2
  Top Layer w7: U2.28 1241.92,2248 1879,2248 1907,2276 1990,2276 P7.10
PB21: P9.10 U2.27 | length 723.6
  Top Layer w7: U2.27 1248.41,2235 1931,2235 P9.10
PB23: C7.2 P9.9 S2.2 U2.25 | length 3210.3
  Top Layer w7: U2.25 1261.38,2209 1818,2209 1900,2127 P9.9 1959,2127 2008,2078 2091,2078 2139.5,2029.5 2139.5,765.5 2085,711 1643,711 1576,778 1576,886 1553,909 C7.2 S2.2@1333.95,909
V5V: C1.1 S1.2 U1.3 | length 316.3
  Top Layer w30: U1.3 1735,1032 C1.1 1743.06,1037.94 S1.2
VCC: C8.2 D2.2 R4.2 U2.3 | length 2235
  Top Layer w7: C8.2@951.99,2010.99 C8.2 C8.2@946,2015 ; v3@979,2005 v3(980,2006) ; U2.3 991.49,2075.51 ; C8.2@946,2015 C8.2@951.99,2020.99 ; C8.2@946,2015 946,2021.01 951.99,2027 ; C8.2@951.99,2020.99 991.49,2060.49 ; C8.2@951.99,2020.99 951.99,2027 ; C8.2@951.99,2020.99 951.99,2012.99 991.49,2052.49 991.49,2060.49 ; 951.99,2027 983,2058.01 ; 983,2058.01 983,2067.03 991.49,2075.51 ; 983,2058.01 991.49,2066.5 ; 991.49,2060.49 991.49,2066.5 ; 991.49,2066.5 991.49,2075.51
  Top Layer w20: C8.2 v3@979,2005
  Top Layer w30: R4.2 275,1164 287,1176 313,1176 332.38,1195.38 332.38,1216.13 D2.2 ; D2.2@341.62,1218.38 D2.2 ; v1(1136,1864) v1(1136,1831) 1136,1628 1026,1518 562,1518 428,1384 428,1311.76 D2.2
  Bottom Layer w20: v1(1136,1831) 1136,1850 ; v1@1122,1864 1136,1850 ; v1@1122,1864 v1(1136,1864) ; v1@1122,1864 v3(980,2006) 994,2006 v1(1136,1864) ; 1136,1850 v1(1136,1864)
VDCIA: C6.1 L2.2 U2.35 | length 845.1
  Top Layer w7: C6.1@1090,2395 1103,2382 ; U2.35 1109.25,2319 ; 1103,2374.25 1103,2325.25 1109.25,2319 ; 1103,2374.25 1103,2382 ; 1103,2374.25 1089,2388.25 C6.1 1103,2386 ; 1103,2374.25 1109.25,2368 ; 1103,2382 1103,2386 ; 1103,2382 1109.25,2375.75 ; 1103,2386 1109.25,2379.75 1109.25,2375.75 ; 1109.25,2319 1109.25,2368 ; 1109.25,2368 1109.25,2375.75
  Top Layer w20: v3(745,2108) L2.2
  Bottom Layer w20: v3(745,2108) 745,2298 825,2378 v3(1076,2378)
VDCID: C9.2 L1.2 L2.1 U2.1 | length 455.1
  Top Layer w7: L1.2 L1.2@795.07,2039.07 ; C9.2@928,2102 C9.2 ; U2.1 998,2121 ; C9.2 C9.2@927,2115 ; C9.2 986,2109 992,2115 ; C9.2@927,2115 992,2115 ; C9.2@927,2115 933,2121 998,2121 ; 992,2115 998,2121
  Top Layer w15: L1.2@795.07,2039.07 840,2084 L2.1 ; L2.1@844,2109 C9.2
VINTA: C5.1 U2.33 | length 141.7
  Top Layer w7: U2.33 1169.07,2272.4 1197.8,2301.13 1197.8,2301.31 1250.93,2354.44 cw(c1274,2331.38) C5.1
VSW: L1.1 U2.2 | length 394.4
  Top Layer w7: L1.1 L1.1@862,2036 ; U2.2 990.49,2094 ; L1.1@862,2036 862,2051 940,2051 ; L1.1@862,2036 871,2045 941.49,2045 947.49,2051 ; 940,2051 947.49,2051 ; 940,2051 983,2094 990.49,2094 ; 947.49,2051 990.49,2094
X32KI: R9.2 U2.48 Y2.1 | length 298.7
  Top Layer w7: R9.2 752,2186 Y2.1 845,2186 889,2230 944.92,2230 U2.48
X32KO: R8.2 U2.47 Y2.2 | length 306.4
  Top Layer w7: R8.2 746.43,2284.43 Y2.2 909.98,2284.43 U2.47
X32MI: U2.32 Y1.3 | length 210.6
  Top Layer w7: U2.32 1233.97,2318 1277.03,2318 ccw(c1277.03,2418) 1347.74,2347.29 Y1.3
X32MO: U2.31 Y1.1 | length 357.2
  Top Layer w7: U2.31 1233.46,2298 1352.2,2298 ccw(c1352.2,2345.8) 1386,2312 ccw(c1349.79,2348.21) 1401,2348.21 1401,2354 cw(c1475.37,2354) 1422.78,2406.58 Y1.1
pads on no net: E1.0 J1.0 J1.A8 J1.B8 P2. P2.7 S1.0 S1.3 Y1.2 Y1.4

## Polygon pours and split planes (outlines as drawn)
GND on Top Layer "GNDAA" (hatched 90Degree grid 8 track 8, remove dead copper, pour order 4): 953,2540 1316.72,2540 1316.72,2247.81 1316.72,2238.5 953,2238.5
GND on Top Layer "GNDALL" (solid, remove dead copper, pour order 6): -1.24,2540 2242,2540 2242,-39 2242,-39.5 -18,-39.5
GND on Bottom Layer "GNDALL" (solid, remove dead copper, pour order 5): -11.16,2540 2242,2540 2242,-39 2242,-39.5 -28,-39.5

## Keep-outs
Keep-Out Layer:
  the board outline again, w8

## Other copper
Top Layer:
  rectangle net GND: 1207.93,2516 1300,2544.03
  rectangle net GND: 35.22,2516 1148,2544.03
  rectangle net GND: 1725,2517 1761.5,2540

## Silkscreen, mask and mechanical layers (free items; w line width, h text height)
Top Overlay:
  text "BAT" at 22,2409 h35
  text "3V3" at 346,2407 h35
  text "LED4" at 1870,2380 h35 r90
  text "LED3" at 2142,2380 h35 r90
  text "CC2" at 22,2309 h35
  text "CC1" at 346,2307 h35
  text "B18" at 2101,2307 h35
  text "B19" at 1871,2272 h35 r90
  text "B20" at 2100,2221 h35
  text "B21" at 1786,2210 h35
  text "A0" at 56.99,2209 h35
  text "A6" at 346,2207 h35
  text "A2" at 56.99,2109 h35
  text "A1" at 346,2107 h35
  text "B23" at 1774.34,2107.5 h35
  text "BOOT" at 2147,2063 h35 r90
  text "A15" at 27.83,2009 h35
  text "A3" at 346,2007 h35
  text "B0" at 2102,2006 h35
  text "B1" at 1820.99,2005 h35
  text "A13" at 27.83,1909 h35
  text "A14" at 346,1907 h35
  text "B2" at 2102,1906.57 h35
  text "B3" at 1809.33,1905.71 h35
  text "3V3" at 614,1845.5 h35
  text "RX" at 739.83,1845.5 h35
  text "TX" at 830.67,1845.5 h35
  text "GND" at 939,1845.5 h35
  text "A11" at 39.49,1809 h35
  text "A12" at 346,1807 h35
  text "B4" at 2102,1807.14 h35
  text "B5" at 1809.33,1806.43 h35
  text "A7" at 56.99,1709 h35
  text "B6" at 2102,1707.71 h35
  text "A10" at 346,1707 h35
  text "B7" at 1809.33,1707.14 h35
  text "U_P" at 1774.34,1613.69 h35
  text "U_N" at 2102,1614.12 h35
  text "A9" at 56.99,1609 h35
  text "A8" at 346,1607 h35
  text "3V3" at 604,1515 h35
  text "DCK" at 715.33,1515 h35
  text "DIO" at 826.67,1515 h35
  text "GND" at 938,1515 h35
  text "B8" at 56.99,1509 h35
  text "ETP" at 1774.34,1508.57 h35
  text "ETN" at 2102,1508.86 h35
  text "B9" at 346,1507 h35
  text "3V3" at 604,1453.5 h35
  text "5V" at 740,1453.5 h35
  text "GND" at 825.5,1453.5 h35
  text "GND" at 938,1453.5 h35
  text "B16" at 27.83,1409 h35
  text "ERP" at 1774.34,1409.29 h35
  text "ERN" at 2102,1409.43 h35
  text "B17" at 346,1407 h35
  text "CH579M-R1-1v2" at 1130.4,1328.74 h38
  text "GND" at 1774.34,1310 h35
  text "GND" at 2102,1310 h35
  text "GND" at 22,1309 h35
  text "GND" at 346,1307 h35
  text "3V3" at 604,1189 h35
  text "5V" at 740,1189 h35
  text "GND" at 825.5,1189 h35
  text "GND" at 938,1189 h35
  text "RESET" at 1091.41,994.96 h38
  text "DOWNLOAD" at 1016.37,769.83 h38
  text "ON" at 1698,717 h35
  text "OFF" at 1827,717 h35
Mechanical 1:
  circle w8: c208.2,425.92 r66.93
  circle w8: c658.2,425.92 r66.93
  circle w6: c1054.71,240.06 r12.8
  circle w6: c1282.27,240.06 r12.8
  lines w8: 0,118.11 ccw(c118.17,118.17) 118.24,0 2099.89,0 ccw(c2099.89,118.11) 2218,118.11 2218,2671.07 ccw(c2099.89,2671.07) 2099.89,2789.18 118.11,2789.18 ccw(c118.11,2671.07) 0,2671.07 0,118.11

## Text inside footprints (layer, text, board x,y; h text height)
D1: Top Overlay "+" at 448,1189 h40 r90
D3: Top Overlay "+" at 1719,2465 h40 r90
D4: Top Overlay "+" at 1585,2466 h40 r90
P1: Top Overlay "G" at 1941,387.42 h40; Top Overlay "V" at 1661,387.42 h40; Top Overlay "D+" at 1831,387.42 h40; Top Overlay "D-" at 1741,387.42 h40